# EAGLE board AVR ISP6 to ISP10 (EAGLE 5.07)
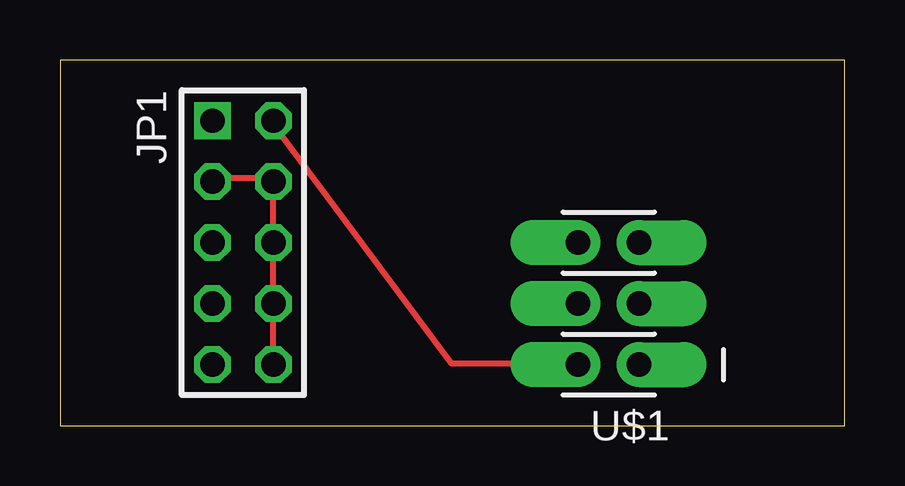
[diagram p0: board, top side]
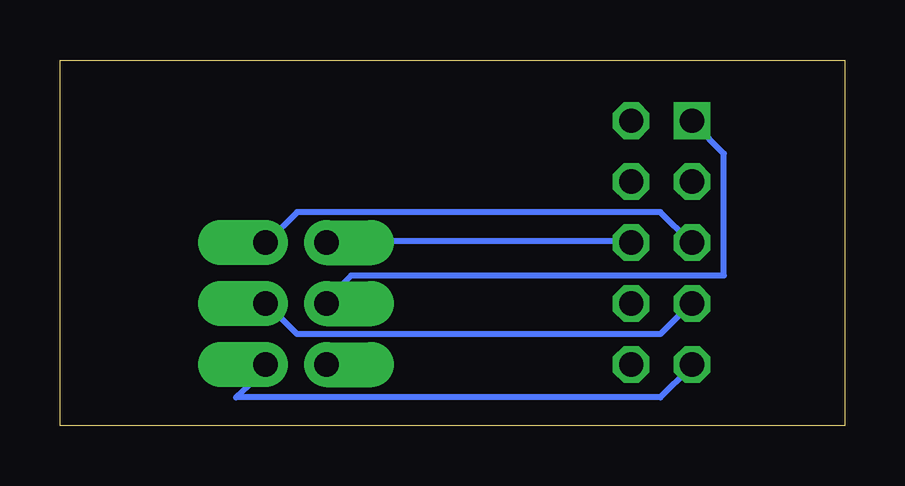
[diagram p1: board, bottom side, seen from below]

Size 32.69 x 15.23 mm. Coordinates in mm from the lower left corner, seen from the top.
Outline: 0,0 32.69,0 32.69,15.23 0,15.23 0,0
Copper layers (1*16): Top 0.035mm / dielectric 1.5mm / Bottom 0.035mm
Design rules "default": minimum track width 10mil, minimum drill 24mil, track to track 8mil, track to pad 8mil, pad to pad 8mil, via to via 8mil, smd to smd 8mil, copper to edge 40mil, drill to drill 8mil, minimum pad ring 10mil, minimum via ring 8mil, stop-mask expansion 4mil, vias tented up to drill 0mil, thermal gap 10mil

## Footprints (pad centres in the part's own frame; a part is rotated, then mirrored left to right if it is on the bottom)
AVR-ISP-10 = drill 1.016 square: 1 -5.08,-1.27 | drill 1.016 octagon: 2 -5.08,1.27; 3 -2.54,-1.27; 4 -2.54,1.27; 5 0,-1.27; 6 0,1.27; 7 2.54,-1.27; 8 2.54,1.27; 9 5.08,-1.27; 10 5.08,1.27
2X3_OFFSET = drill 1.016 pad 1.88 offset: 1 0,0; 2 0,2.54; 3 2.54,0; 4 2.54,2.54; 5 5.08,0; 6 5.08,2.54

## Placement (x,y rotation side)
JP1  AVR-ISP-10  [AVR-ISP-10]  7.62,7.62 270 top
U$1  AVR_SPI_PRG_6OFFSET_PADS  [2X3_OFFSET]  24.13,2.54 90 top

## Library data of the parts
JP1 = avr-6
U$1 = SparkFun

## Nets
GND: JP1.3 JP1.4 JP1.6 JP1.8 JP1.10 U$1.6
N$1: JP1.9 U$1.1
N$2: JP1.7 U$1.3
N$3: JP1.5 U$1.5
N$6: JP1.1 U$1.4
VCC: JP1.2 U$1.2

## Tracks (layer width: path | path; a pad name or v marks a point on that pad's centre or on a via)
GND
  Top 0.254: JP1.3 6.45,10.31 8.89,10.31 JP1.4 JP1.6 JP1.8 JP1.10
  Bottom 0.254: U$1.6 21.59,7.67 8.89,7.67 JP1.6
N$1
  Bottom 0.254: JP1.9 6.45,2.39 7.67,1.17 25.35,1.17 24.03,2.39 U$1.1
N$2
  Bottom 0.254: JP1.7 6.45,5.03 7.67,3.81 22.81,3.81 24.03,5.03 U$1.3
N$3
  Bottom 0.254: JP1.5 6.45,7.67 7.67,8.89 22.81,8.89 24.03,7.67 U$1.5
N$6
  Bottom 0.254: JP1.1 6.25,12.55 5.03,11.33 5.03,6.25 20.57,6.25 21.59,5.23 U$1.4
VCC
  Top 0.254: JP1.2 8.89,12.55 16.31,2.59 21.59,2.59 U$1.2

## Text on the board
tOrigins: MOSI | VTG | AVR ISP6 to ISP10 v1.0 | Kyle Isom <isomk@kyleisom.net> | GND | GND | 2010.01.22 | RST | GND | GND | SCK | SCK | GND | RST | MOSI | MISO | GND | VCC | MISO